# Altium PCB V2.1.PcbDoc
Units mil, origin at the board's own origin, x right, y up, seen from the top; angles counter-clockwise.
Board outline 4375 x 3160 mil, 4 copper layers (Top Layer, gnd, vcc, Bottom Layer), stack 30.634 mil thick; 78 components, 70 nets, 351 pads, 129 vias.
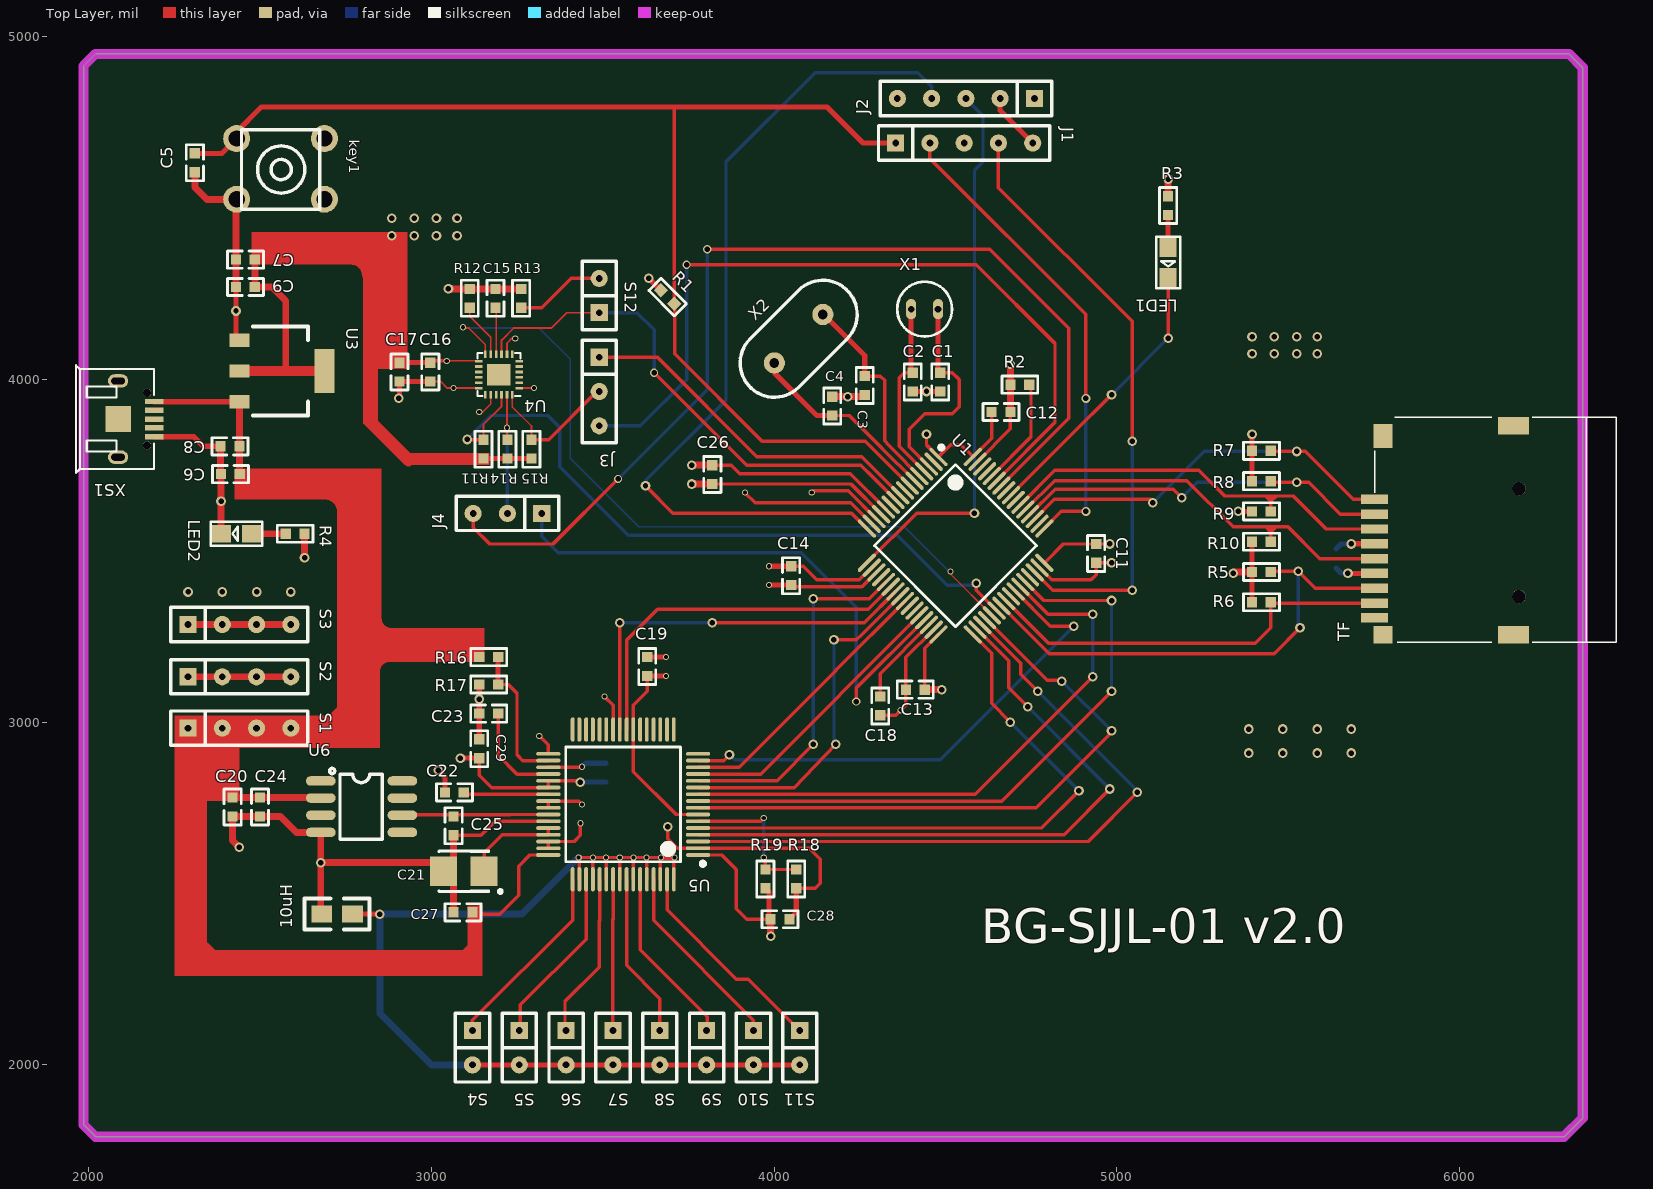
[diagram p0: Top Layer view]
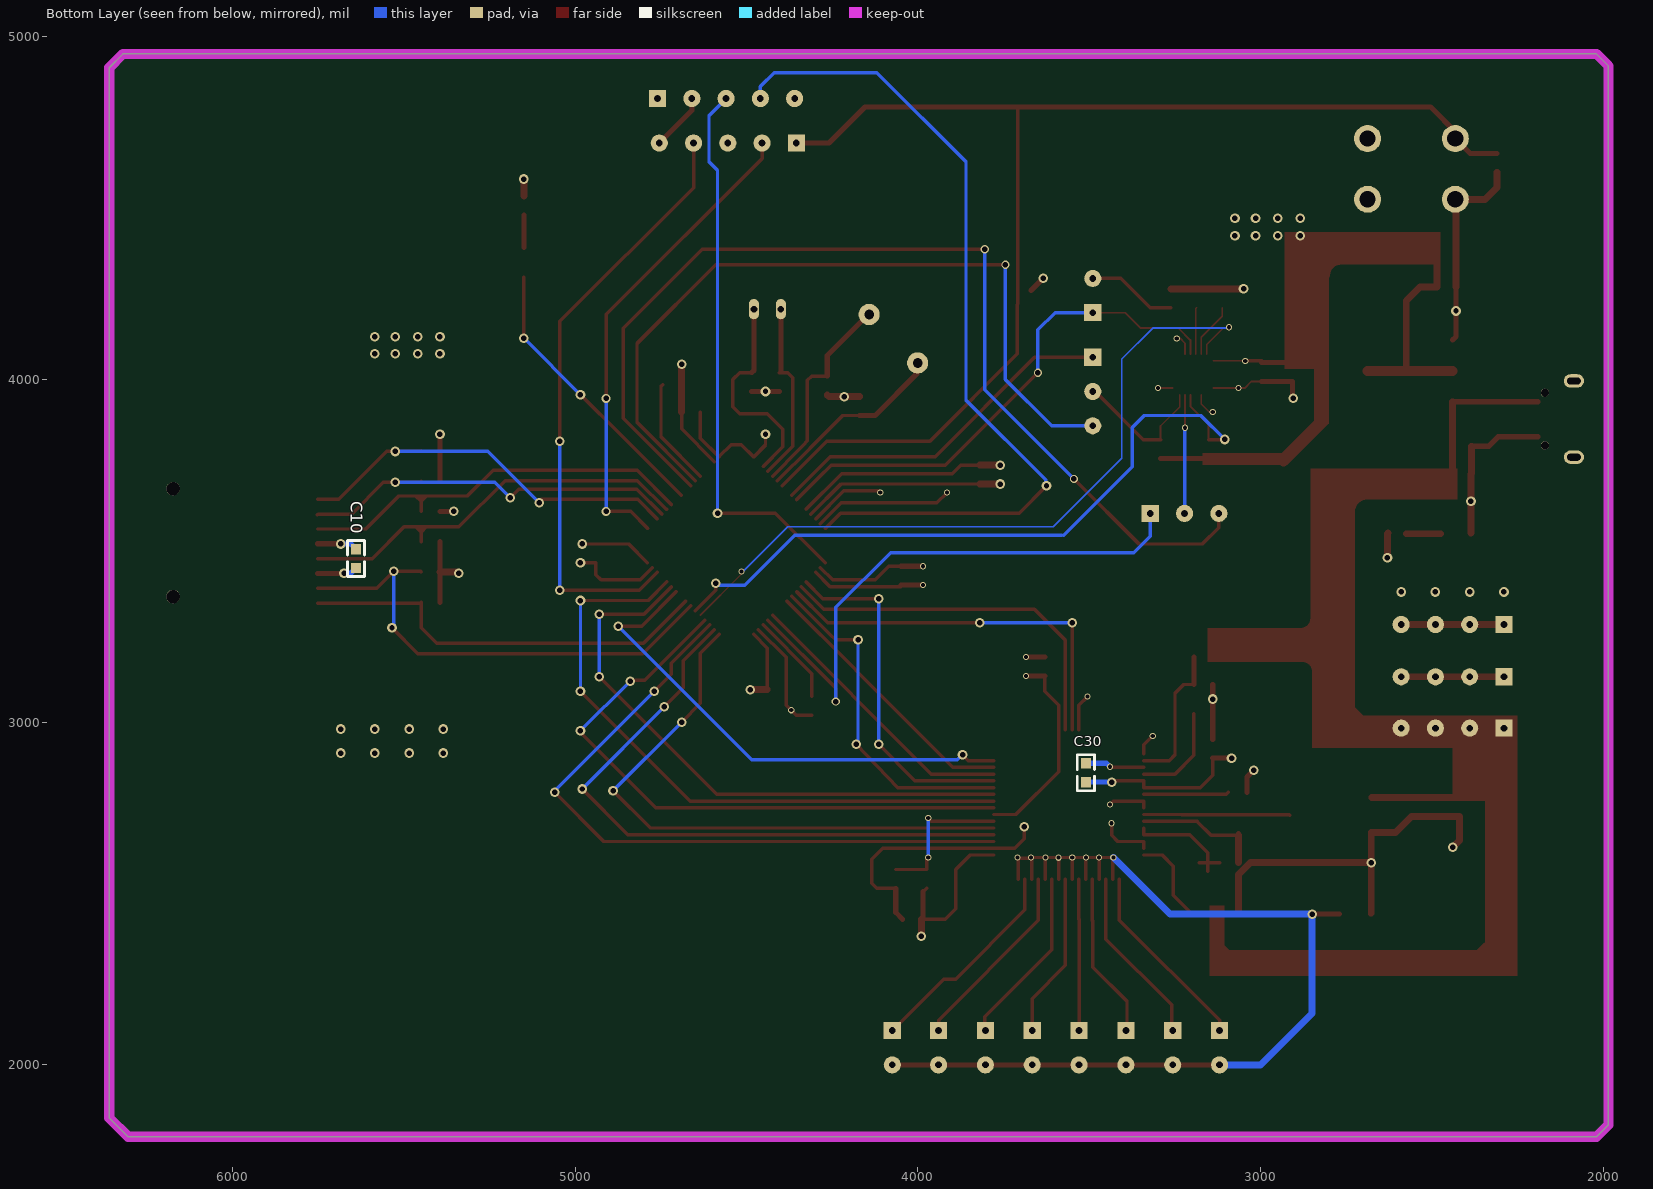
[diagram p1: Bottom Layer view, seen from below]
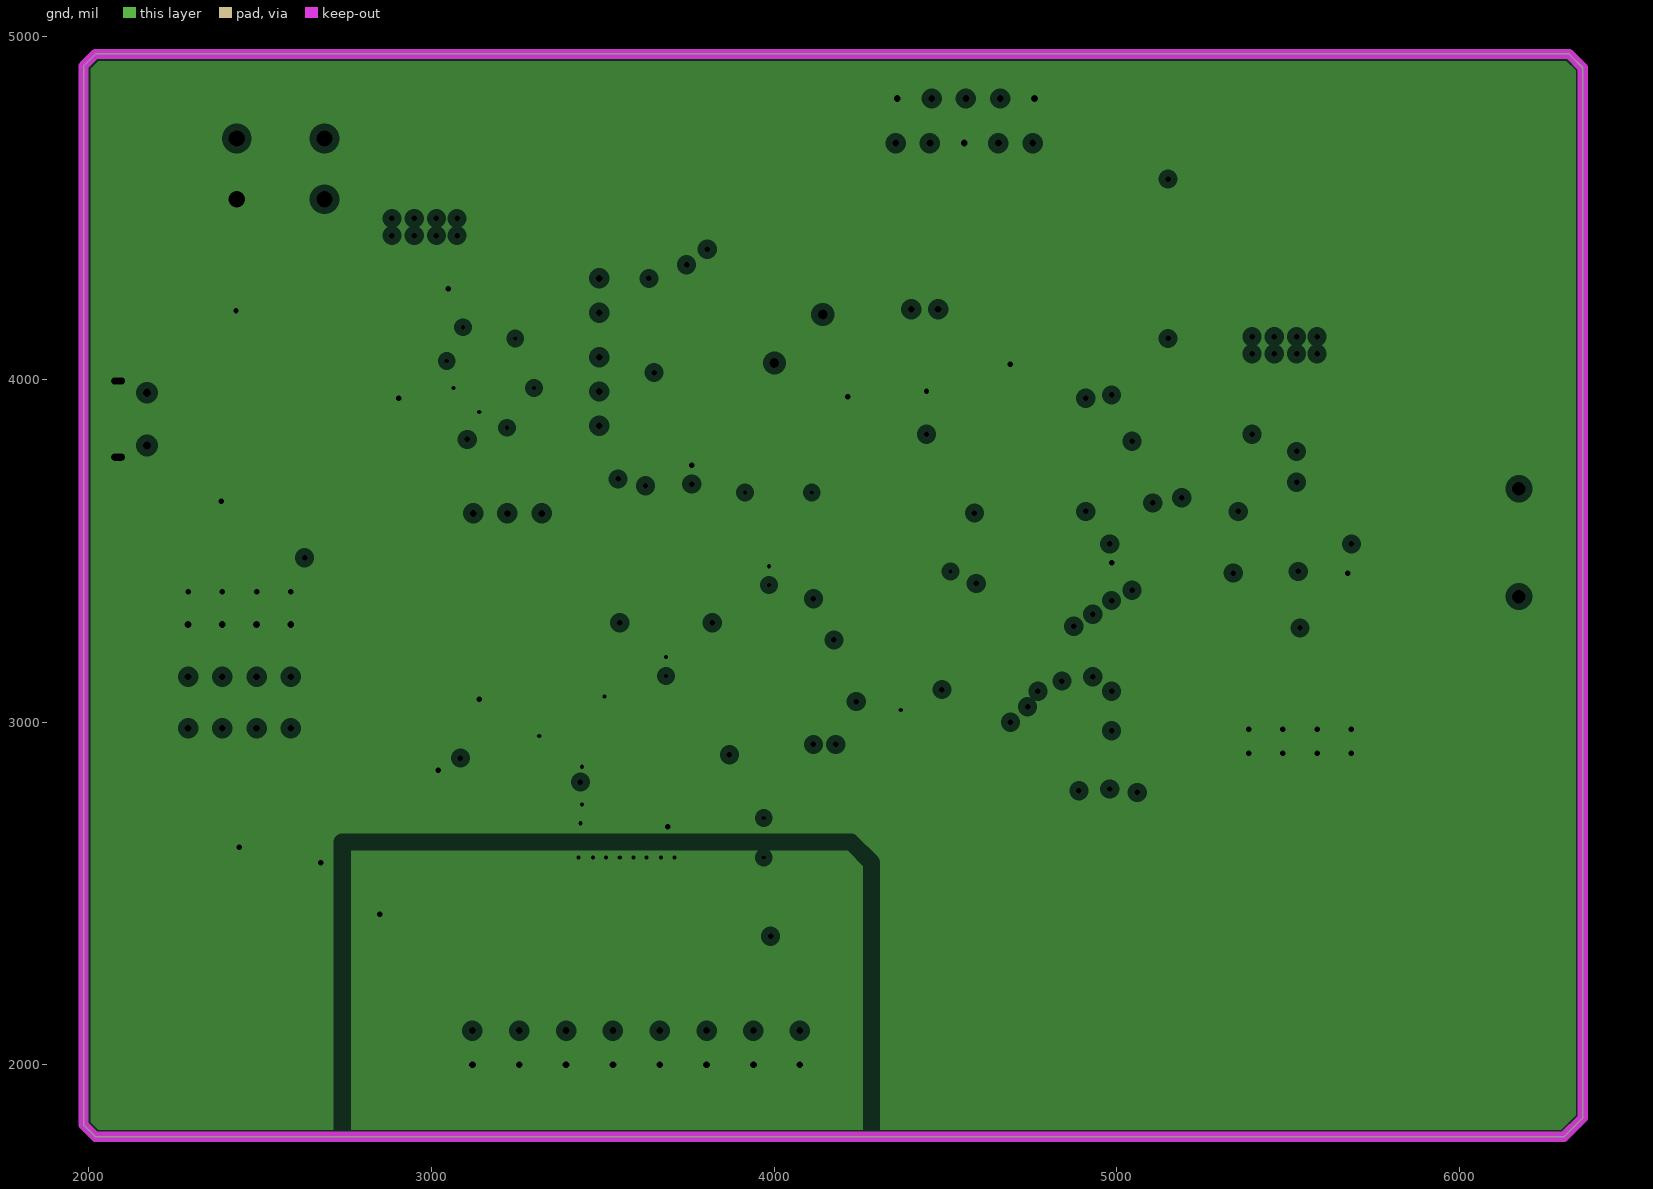
[diagram p2: gnd, clearances drawn from the general rule]
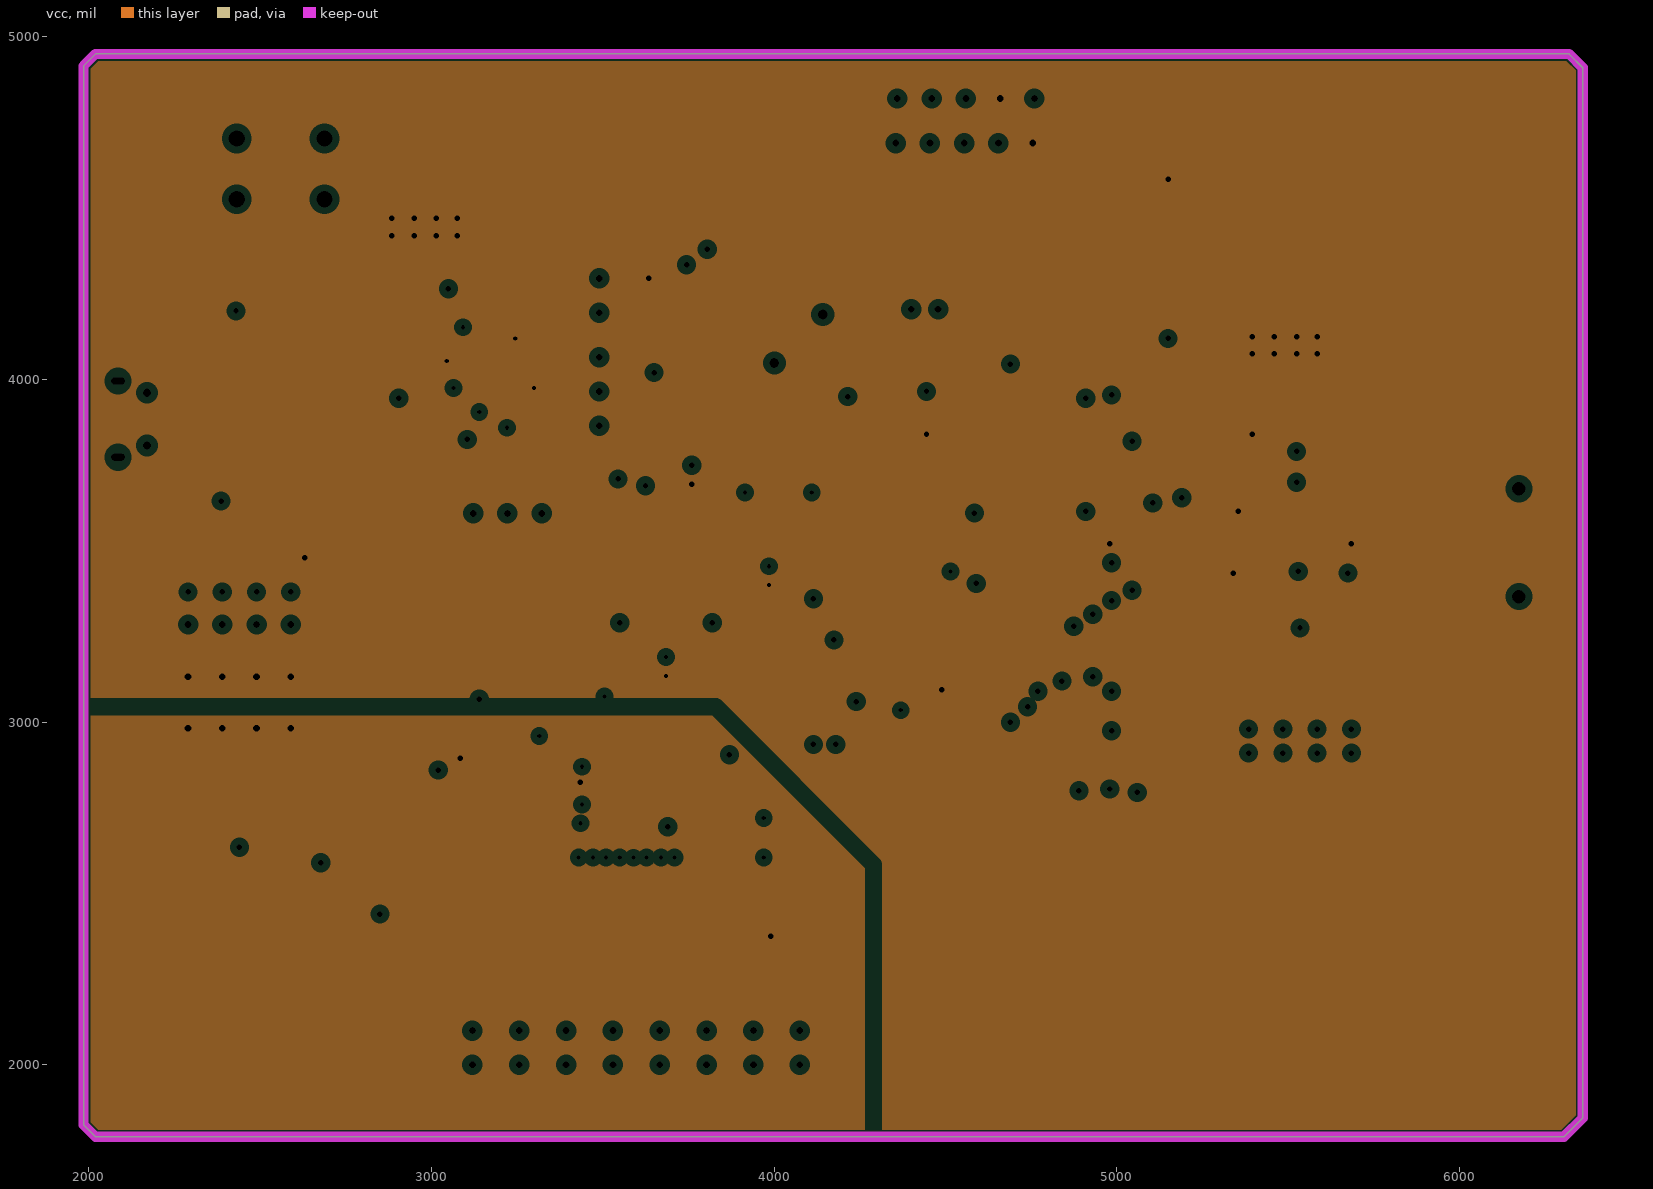
[diagram p3: vcc, clearances drawn from the general rule]

## Layer stack, top to bottom
Top Solder: solder mask 0.4, Solder Resist, Dk 3.5
Top Layer: signal copper 1.4
Dielectric 1: core 10, FR-4, Dk 4.2
gnd: plane copper 1.417, net GND
Dielectric 3: prepreg 5, Dk 4.2
vcc: plane copper 1.417, net 3.3V
Dielectric 2: core 10, Dk 4.2
Bottom Layer: signal copper 1.4
Bottom Solder: solder mask 0.4, Solder Resist, Dk 3.5

## Board outline
1985,1825 1985,4915 2020,4950 6320,4950 6360,4910 6360,1845 6305,1790 2020,1790

## Design rules (kind name [scope] priority, off if disabled: settings)
Clearance [All] p1: gap=10 except(8: Arc-Arc Arc-Track Arc-SMDPad Track-Track Track-SMDPad SMDPad-SMDPad)
ComponentClearance [All] p1: gap=0 collisioncheckmode=3 verticalgap=0 showdistances=FALSE
PlaneClearance [All] p1: clearance=20
PlaneConnect [All] p1: planeconnectstyle=Relief reliefexpansion=20 reliefentries=4 reliefconductorwidth=10 reliefairgap=10
PolygonConnect [All] p1: connectstyle=Relief reliefconductorwidth=10 reliefentries=4 polygonreliefangle="90 Angle" airgapwidth=10
RoutingVias [All] p1: holewidth=28 width=50 viastyle="Through Hole" minholewidth=28 minwidth=50 maxholewidth=28 maxwidth=50
SolderMaskExpansion [All] p1: expansion=4
Width [All] p1: maxlimit=30 minlimit=5 preferedwidth=10
27 further rules are at their usual default settings.

## Classes and differential pairs
net class "New Class": SDIO_CLK SDIO_CMD SDIO_D0 SDIO_D1 SDIO_D2 SDIO_D3

## Components (designator, comment, footprint, x,y, rotation, side; value= is the part's Value field where it differs from the comment)
10uH "L1" 0805 2770,2440 r180 top
C1 "10p" 0603-cap 4485,3965 r90 top
C2 "10p" 0603-cap 4405,3965 r90 top
C3 "22p" 0603-cap 4265,3955 r90 top
C4 "22p" 0603-cap 4170,3950 r270 top
C5 "0.1u" 0603-cap 2310,4660 r270 top
C6 "10u" 0603-cap 2441.35,3724 r180 top
C7 "10u" 0603-cap 2485,4350 r180 top
C8 "0.1u" 0603-cap 2440,3805 r180 top
C9 "0.1u" 0603-cap 2485,4270 r180 top
C10 "0.1u" 0603-cap 5640,3505 r270 bottom
C11 "10u" 0603-cap 4940,3520 r270 top
C12 "0.1u" 0603-cap 4635,3905 r0 top
C13 "0.1u" 0603-cap 4440,3095 r180 top
C14 "0.1u" 0603-cap 4050,3400 r90 top
C15 "0.1u" 0603-cap 3187.12,4264.26 r270 top
C16 "0.01u" 0603-cap 2997.12,3994.26 r90 top
C17 "0.1u" 0603-cap 2907.12,3994.26 r90 top
C18 "4.7u" 0603-cap 4310,3020 r90 top
C19 "0.1uF" 0603-cap 3630,3135 r90 top
C20 "0.1u" 0603-cap 2420,2725 r90 top
C21 "22uF" C1206_Y 3095,2565 r180 top
C22 "0.1u" 0603-cap 3040,2795 r0 top
C23 "0.1u" 0603-cap 3195,3025 r180 top
C24 "10u" 0603-cap 2500,2780 r270 top
C25 "0.1u" 0603-cap 3065,2725 r270 top
C26 "0.1u" 0603-cap 3820,3695 r90 top
C27 "0.1u" 0603-cap 3120,2445 r180 top
C28 "0.1u" 0603-cap 3990,2425 r0 top
C29 "0.1u" 0603-cap 3140,2895 r90 top
C30 "0.1u" 0603-cap 3510,2825 r90 bottom
J1 "CON5" SIP05 4355,4690 r0 top
J2 "CON5" SIP05 4760,4820 r180 top
J3 "CON3" SIP03 3490,4065 r270 top
J4 "CON3" SIP03 3322.12,3609.26 r180 top
key1 "KEY_1" "key - duplicate5" 2545,4590 r180 top
LED1 "LED?" LED 5150,4385 r270 top
LED2 "LED?" LED 2475,3550 r180 top
R1 "10k" 0603-res 3670,4260 r315 top
R2 "10k" 0603-res 4690,3985 r0 top
R3 "1k" 0603-res 5150,4480 r90 top
R4 "1k" 0603-res 2630,3550 r180 top
R5 "4.7k" 0603-res 5395,3438.33 r0 top
R6 "4.7k" 0603-res 5395,3350 r0 top
R7 "4.7k" 0603-res 5395,3791.67 r0 top
R8 "4.7k" 0603-res 5395,3703.33 r0 top
R9 "4.7k" 0603-res 5395,3615 r0 top
R10 "4.7k" 0603-res 5395,3526.67 r0 top
R11 "10k" 0603-res 3152.12,3824.26 r270 top
R12 "10k" 0603-res 3112.12,4264.26 r270 top
R13 "10k" 0603-res 3262.12,4264.26 r270 top
R14 "10k" 0603-res 3222.12,3824.26 r270 top
R15 "10k" 0603-res 3292.12,3824.26 r270 top
R16 "10K" 0603-res 3140,3190 r0 top
R17 "10K" 0603-res 3140,3110 r0 top
R18 "10K" 0603-res 4065,2570 r270 top
R19 "10K" 0603-res 3975,2570 r270 top
S1 "CON4" SIP04 2290,2982.5 r0 top
S2 "CON4" SIP04 2290,3132.5 r0 top
S3 "CON4" SIP04 2290,3285 r0 top
S4 "CON2" SIP02 3120,2100 r270 top
S5 "CON2" SIP02 3256.67,2100 r270 top
S6 "CON2" SIP02 3393.33,2100 r270 top
S7 "CON2" SIP02 3530,2100 r270 top
S8 "CON2" SIP02 3666.67,2100 r270 top
S9 "CON2" SIP02 3803.33,2100 r270 top
S10 "CON2" SIP02 3940,2100 r270 top
S11 "CON2" SIP02 4075,2100 r270 top
S12 "CON2" SIP02 3490,4195 r90 top
TF "U2" TF-01A 5955,3560 r90 top
U1 "STM32F446RET6" LQFP-64_10X10X05P 4530,3515 r315 top
U3 "ASM117-3.3" SOT-223 2440,4115 r270 top
U4 "MPU9250" QFN-24-1EP_3X3MM_PITCH0.4MM 3197.12,4014.26 r180 top
U5 "AD7606BSTZ-4" AD7606 3560,2770 r180 top
U6 "ADR421BR" ADR421 2780,2750 r0 top
X1 "32.768KHz" XTAL-B 4440,4205 r0 top
X2 "8MHz" XTAL2 3980,4225 r135 top
XS1 "USB1" "micro USB" 2143.64,3881.57 r90 top

## Footprints (in the part's own frame and the unit in brackets; to place one, negate y for a bottom-side part, rotate by r counter-clockwise, add the part's x,y. Pads: shape width x height; smd on the part's side, far side on the other; paste and mask are expansions set on the pad)
0603-cap [mil]
  rect 30x30 smd: 1(0,0) 2(55,0)
  silkscreen extent -25,-25 80,25
0603-res [mil]
  rect 30x30 smd: 1(0,0) 2(55,0)
  silkscreen extent -25,-25 80,25
0805 [mil]
  rect 60x50 smd: 1(0,0) 2(90,0)
  silkscreen extent -50,-45 140,45
AD7606 [mm]
  oval 1.8x0.28 smd: 1(-5.55,4.004) 2(-5.55,3.504) 3(-5.55,3.004) 4(-5.55,2.504) 5(-5.55,2.004) 6(-5.55,1.504) 7(-5.55,1.004) 8(-5.55,0.504) 9(-5.55,0.004) 10(-5.55,-0.496) 11(-5.55,-0.996) 12(-5.55,-1.496) 13(-5.55,-1.996) 14(-5.55,-2.496) 15(-5.55,-2.996) 16(-5.55,-3.496) 33(5.55,-3.496) 34(5.55,-2.996) 35(5.55,-2.496) 36(5.55,-1.996) 37(5.55,-1.496) 38(5.55,-0.996) 39(5.55,-0.496) 40(5.55,0.004) 41(5.55,0.504) 42(5.55,1.004) 43(5.55,1.504) 44(5.55,2.004) 45(5.55,2.504) 46(5.55,3.004) 47(5.55,3.504) 48(5.55,4.004)
  oval 0.28x1.8 smd: 17(-3.75,-5.296) 18(-3.25,-5.296) 19(-2.75,-5.296) 20(-2.25,-5.296) 21(-1.75,-5.296) 22(-1.25,-5.296) 23(-0.75,-5.296) 24(-0.25,-5.296) 25(0.25,-5.296) 26(0.75,-5.296) 27(1.25,-5.296) 28(1.75,-5.296) 29(2.25,-5.296) 30(2.75,-5.296) 31(3.25,-5.296) 32(3.75,-5.296) 49(3.75,5.804) 50(3.25,5.804) 51(2.75,5.804) 52(2.25,5.804) 53(1.75,5.804) 54(1.25,5.804) 55(0.75,5.804) 56(0.25,5.804) 57(-0.25,5.804) 58(-0.75,5.804) 59(-1.25,5.804) 60(-1.75,5.804) 61(-2.25,5.804) 62(-2.75,5.804) 63(-3.25,5.804) 64(-3.75,5.804)
  silkscreen extent -6.05,-4 4.25,4.8
ADR421 [mm]
  oval 2.2x0.7 smd: 1(-2.606,1.994) 2(-2.606,0.724) 3(-2.606,-0.546) 4(-2.606,-1.816) 5(3.439,-1.816) 6(3.439,-0.546) 7(3.439,0.724) 8(3.439,1.994)
  silkscreen extent -1.96,-2.32 1.97,2.92
C1206_Y [mm]
  rect 2x2.2 smd: 1(-1.5,0) 2(1.5,0)
  silkscreen extent -2.82,-1.5 1.85,1.62
"key - duplicate5" [mm]
  round 2 hole 1.2: 1(2.869,-2.874) 2(2.869,1.626) 3(-3.631,-2.874) 4(-3.631,1.626)
  silkscreen extent -3.28,-3.52 2.52,2.38
LED [mm]
  rect 1.4x1.27 smd: 1(0,0) 2(2.21,0)
  silkscreen extent -0.8,-0.89 3.01,0.89
LQFP-64_10X10X05P [mm]
  oval 1.8x0.28 smd: 1(-5.55,3.75) 2(-5.55,3.25) 3(-5.55,2.75) 4(-5.55,2.25) 5(-5.55,1.75) 6(-5.55,1.25) 7(-5.55,0.75) 8(-5.55,0.25) 9(-5.55,-0.25) 10(-5.55,-0.75) 11(-5.55,-1.25) 12(-5.55,-1.75) 13(-5.55,-2.25) 14(-5.55,-2.75) 15(-5.55,-3.25) 16(-5.55,-3.75) 33(5.55,-3.75) 34(5.55,-3.25) 35(5.55,-2.75) 36(5.55,-2.25) 37(5.55,-1.75) 38(5.55,-1.25) 39(5.55,-0.75) 40(5.55,-0.25) 41(5.55,0.25) 42(5.55,0.75) 43(5.55,1.25) 44(5.55,1.75) 45(5.55,2.25) 46(5.55,2.75) 47(5.55,3.25) 48(5.55,3.75)
  oval 0.28x1.8 smd: 17(-3.75,-5.55) 18(-3.25,-5.55) 19(-2.75,-5.55) 20(-2.25,-5.55) 21(-1.75,-5.55) 22(-1.25,-5.55) 23(-0.75,-5.55) 24(-0.25,-5.55) 25(0.25,-5.55) 26(0.75,-5.55) 27(1.25,-5.55) 28(1.75,-5.55) 29(2.25,-5.55) 30(2.75,-5.55) 31(3.25,-5.55) 32(3.75,-5.55) 49(3.75,5.55) 50(3.25,5.55) 51(2.75,5.55) 52(2.25,5.55) 53(1.75,5.55) 54(1.25,5.55) 55(0.75,5.55) 56(0.25,5.55) 57(-0.25,5.55) 58(-0.75,5.55) 59(-1.25,5.55) 60(-1.75,5.55) 61(-2.25,5.55) 62(-2.75,5.55) 63(-3.25,5.55) 64(-3.75,5.55)
  silkscreen extent -6.05,-4.25 4.25,4.55
"micro USB" [mm]
  rect 0.4x1.35 smd mask+0.05: 1(1.376,-1.211) 2(0.726,-1.211) 3(0.076,-1.211) 4(-0.574,-1.211) 5(-1.224,-1.211)
  oval 1x1.5 hole 0.5 slot 1 at 90 deg unplated mask+0.05: 6(-2.749,1.465) 7(2.901,1.465)
  round 0.6 hole 0.6 mask+0.05: ""(-1.874,-0.686) ""(2.026,-0.686)
  rect 1.9x1.9 smd mask+0.05: ""(0.076,1.465)
  silkscreen extent -3.92,-1.21 4.08,4.59
QFN-24-1EP_3X3MM_PITCH0.4MM [mm]
  rect 0.55x0.2 smd: 1(-1.5,1) 2(-1.5,0.6) 3(-1.5,0.2) 4(-1.5,-0.2) 5(-1.5,-0.6) 6(-1.5,-1) 13(1.5,-1) 14(1.5,-0.6) 15(1.5,-0.2) 16(1.5,0.2) 17(1.5,0.6) 18(1.5,1)
  rect 0.2x0.55 smd: 7(-1,-1.5) 8(-0.6,-1.5) 9(-0.2,-1.5) 10(0.2,-1.5) 11(0.6,-1.5) 12(1,-1.5) 19(1,1.5) 20(0.6,1.5) 21(0.2,1.5) 22(-0.2,1.5) 23(-0.6,1.5) 24(-1,1.5)
  rect 0.875x0.8 smd: 25(-0.435,0.4) 25(-0.435,-0.4) 25(0.435,0.4) 25(0.435,-0.4)
  silkscreen extent -1.6,-1.6 1.6,1.6
SIP02 [mm]
  rect 1.27x1.27 hole 0.5: 1(0,0)
  round 1.27 hole 0.5: 2(2.54,0)
  silkscreen extent -1.27,-1.27 3.81,1.27
SIP03 [mm]
  rect 1.27x1.27 hole 0.5: 1(0,0)
  round 1.27 hole 0.5: 2(2.54,0) 3(5.08,0)
  silkscreen extent -1.27,-1.27 6.35,1.27
SIP04 [mm]
  rect 1.27x1.27 hole 0.5: 1(0,0)
  round 1.27 hole 0.5: 2(2.54,0) 3(5.08,0) 4(7.62,0)
  silkscreen extent -1.27,-1.27 8.89,1.27
SIP05 [mm]
  rect 1.27x1.27 hole 0.5: 1(0,0)
  round 1.27 hole 0.5: 2(2.54,0) 3(5.08,0) 4(7.62,0) 5(10.16,0)
  silkscreen extent -1.27,-1.27 11.43,1.27
SOT-223 [mil]
  rect 39x59 smd: 1(0,0) 3(180,0)
  rect 129.13x59 smd: 2(90,248.03)
  rect 38.98x59.06 smd: 2(90,0)
  silkscreen extent -40,40 220,200
TF-01A [mm]
  rect 0.7x2 smd: 1(2.291,5.146) 2(1.193,5.143) 3(0.095,5.146) 4(-1.003,5.146) 5(-2.103,5.146) 6(-3.2,5.146) 7(-4.298,5.146) 8(-5.395,5.146) 9(-6.5,5.146)
  rect 1.27x1.397 smd: 10(-7.747,4.507)
  rect 1.27x2.286 smd: 11(-7.747,-5.145) 12(7.747,-5.145)
  rect 1.778x1.397 smd: 13(6.985,4.507)
  round 1 hole 1 unplated: ""(-4.915,-5.557) ""(3.084,-5.554)
  silkscreen extent -8.31,-12.76 8.39,5.14
XTAL2 [mil]
  round 62 hole 28: 1(-140,110) 2(-140,-90)
  silkscreen extent -240,-190 -40,210
XTAL-B [mm]
  oval 0.75x1.5 hole 0.5: 1(-1.011,0.008) 2(0.989,0.008)
  silkscreen extent -2.04,-2.02 2.02,2.04

## Part data
10uH: library part L
C1 C2 C3 C4 C5 C6 C7 C8 C9 C10 C11 C12 C13 C14 C15 C16 C17 C18 C19 C20 C22 C23 C24 C25 C26 C27 C28 C29 C30: library part CAP
C21: library part 电解电容, "Capacitor"
LED1 LED2: library part LED
R1 R2 R3 R4 R5 R6 R7 R8 R9 R10 R11 R12 R13 R14 R15 R16 R17 R18 R19: library part RES
TF: library part TF-01A
U6: library part ADR421
X1 X2: library part XTAL

## Via types
v1: diameter 28, hole 16, Top Layer to Bottom Layer, 92 vias
v2: diameter 18, hole 12, Top Layer to Bottom Layer, 30 vias
v3: diameter 24, hole 16, Top Layer to Bottom Layer, 5 vias
v4: diameter 26, hole 16, Top Layer to Bottom Layer, 2 vias

## Nets (pads, with @x,y where several pads share a name; then routed paths per layer and width w, separated by ;. In a path a pad name is that pad's centre, name@x,y a point inside that pad or via, vN(x,y) a via of type N, cw(c..) or ccw(c..) an arc to the next point about the centre after c; other vN are vias at no path point)
3.3V: C7.1 C9.1 C10.1 C11.1 C12.1 C13.1 C14.1 C16.2 C17.2 C19.1 C26.1 J1.5 J2.2 R1.1 R3.2 R4.1 R5.1 R6.1 R7.1 R8.1 R9.1 R10.1 R11.2 R14.2 R15.2 S2.1 S2.2 S2.3 S2.4 TF.4 U1.1 U1.13 U1.19 U1.32 U1.48 U1.64 U3.2 U4.1 U4.8 U4.13 U5.7 U5.23 | length 6300.1
  Top Layer w5: C16.2 C16.2@2997.12,4054.31 ; v2(3045,4054.31) U4.13@3138.07,4054.31 ; U4.8 3220.75,4105.75 3235,4120 v2(3245,4120) ; U4.1 v2(3299.88,3974.88) v2@3300,3975
  Top Layer w10: 2690,4350 ccw(c2697.5,4397.5) 2703.08,4349.74 ; 2695,4350 cw(c2697.5,4302.5) 2700,4350 cw(c2697.5,4302.5) 2703.08,4349.74 ; 2745,4390 cw(c2697.5,4397.5) 2705,4350 cw(c2697.5,4397.5) 2703.08,4349.74 ; C16.2@2997.12,4054.31 v2(3045,4054.31) ; 3589.53,2940 3589.53,2855.47 3714.53,2730.47 U5.7 ; 3589.53,2940.01 U5.23 3589.53,3049.53 3630,3090 C19.1 ; C26.1 4224.73,3695 U1.13 ; C14.1@4050,3395 4256.88,3395 U1.19 ; C13.1 4440,3216.21 U1.32 ; v1(4445,3840) 4445,3808.79 U1.1 4515.99,3810 4545,3810 4579.52,3775.48 U1.64@4579.52,3774.48 ; U1.64 4635,3828.79 C12.1 ; U1.48@4789.48,3465.48 4844.01,3520 C11.1 v1(4980,3520)
  Top Layer w15: 2725,4350 2740,4365 ; C17.2 C16.2 ; R11.2 R14.2 R15.2 ; C19.1 v2(3685,3135) ; v1(3635,4295) R1.1 ; v2(3985,3400) C14.1 ; J2.2 4660,4785 J1.5 ; v1(5355,3615) R9.1 ; R6.1 R5.1 R10.1 ; R8.1 R7.1 v1(5395,3840) ; v1(5685,3520) 5685.5,3520.5 TF.4
  Top Layer w20: S2.1 S2.2 S2.3 S2.4 ; 2575,4025 2575,4230 2535,4270 C9.1 C7.1 2695,4350 2700,4350 2705,4350 2725,4350 ; R4.1@2628.03,3551.97 R4.1 v1@2630,3490 ; 2760,4350 2810,4350 ; 2825,4040 2825,3885 2940.74,3769.26 R11.2 ; 2850,4050 2906.38,4050 C17.2 2907.12,4252.88 ; v1(2885,4420) 2845,4420 2810,4385 2810,4350 ; 2905,4255 2810,4350 ; v1(3760,3695) C26.1 ; C13.1 v1(4490,3095) ; R3.2 v1(5150,4585) ; v1(5340,3435) 5343.33,3438.33 R5.1
  Top Layer w30: U3.2@2440,4025 2575,4025 U3.2@2688.03,4025 ; 2760,4350 cw(c2765.25,4302.73) 2812.75,4305.23 ; 2815,3880 2933.24,3761.76 2940.74,3769.26
  Bottom Layer w15: C10.1 5655,3520 v1(5685,3520)
  other v1: 2630,3480 5395,4075 5460,4075 5525,4075 5585,4075 5395,4125 5460,4125 5525,4125 5585,4125 2950,4420 3015,4420 3075,4420 2885,4470 2950,4470 3015,4470 3075,4470
5V: C6.1 C8.1 C20.2 C24.1 C27.1 C28.1 C29.1 C30.1 R16.1 R19.2 S1.1 S1.2 S1.3 S1.4 U3.3 U5.1 U5.37 U5.38 U5.48 U6.2 XS1.1 | length 5934.7
  Top Layer w10: 3070,3190 R16.1 ; C27.1 3125,2440 3200,2440 3255,2495 3255,2580 3287.36,2612.36 U5.48 ; C29.1 3140,2845 3175.79,2809.21 U5.38 U5.37 3431.1,2828.9 v1(3435,2825) ; U5.1 3847.64,2612.36 3890,2570 3890,2455 3920,2425 C28.1 C28.1@3985,2430 ; R19.2 R19.2@3985,2505
  Top Layer w15: C6.1@2440,3725.35 C6.1 ; U3.3 2439.25,3935.75 U3.3@2440,3935.75 ; U6.2@2675.9,2780 U6.2 ; v1(3085,2895) C29.1 ; C28.1@3985,2430 R19.2@3985,2505
  Top Layer w16: XS1.1 U3.3@2439.25,3935.75
  Top Layer w20: C6.1@2440,3725.35 C8.1 U3.3 ; C6.1 2656,3724 2735,3645 2735,3040 2677.5,2982.5 S1.4 S1.3 S1.2 ; U6.2@2675.9,2780 C24.1 C20.2 2390,2810 S1.2 ; 2685,3660 cw(c2687.5,3612.5) 2735,3615 ; 2735,3190 R16.1 ; 2840,3145 cw(c2877.5,3147.5) 2875,3185 ; 2845,3310 ccw(c2885,3305) 2880,3265 ; C27.1 3120,2350 3070,2300 2390,2300 2290,2400 S1.1 S1.2 ; v1(3990,2375) C28.1
  Bottom Layer w15: v1(3435,2825) C30.1
AD0/SDO: S12.1 U1.10 U4.9 | length 1523.9
  Top Layer w5: U4.9 3205,4115 3240,4150 3350,4150 3395,4195 S12.1
  Top Layer w10: v3(3650,4020) 3920,3750 4252.8,3750 4273.02,3729.78 ; 4273.24,3730 U1.10
  Bottom Layer w10: S12.1 3600,4195 3650,4145 v3(3650,4020)
ADC1_IN0: U1.14 | length 225
  Top Layer w10: v2(4110,3670) 4115,3675 4216.88,3675 U1.14
ADC1_IN1: U1.15 | length 407.7
  Top Layer w10: v2(3915,3670) 3945,3640 4224.05,3640 U1.15
ADC1_IN8: U1.26
ADC1_IN9: U1.27
BOOT0: R2.2 U1.60 | length 316.2
  Top Layer w10: U1.60 4750,3832.44 4750,3980 R2.2
BUSY: U1.25 U5.14 | length 805.6
  Top Layer w10: U5.14 3898.27,2868.27 4180,3150 4180,3151.08 U1.25
CD: TF.9
CONVST/A: U1.44 U5.9 | length 1878.3
  Top Layer w10: U5.9 4664.84,2769.84 v1(4985,3090) ; U1.44 4787.44,3355 v1(4985,3355)
  Bottom Layer w10: v1(4985,3090) v1(4985,3355)
CONVST/B: U1.43 U5.10 | length 1719.9
  Top Layer w10: U5.10 4474.53,2789.53 ; 4474.53,2789.84 4587.34,2789.84 v1(4930,3132.5) ; U1.43 4799.59,3315 v1(4930,3315)
  Bottom Layer w10: v1(4930,3132.5) v1(4930,3315)
CS: U1.28 U5.13 | length 837.6
  Top Layer w10: U5.13 3961.02,2848.58 U1.28
ESC: U4.7
ESD: U4.21
FRSTDATA: U1.42 U5.15 | length 1482.9
  Top Layer w10: U5.15 3852.95,2887.95 v1(3870,2905) ; U1.42 4806.76,3280 v1(4875,3280)
  Bottom Layer w10: v1(3870,2905) 3885,2890 4485,2890 v1(4875,3280)
FSYNC: R12.2 U4.11 | length 161.4
  Top Layer w5: R12.2 3112.12,4184.26 3173.5,4122.88 U4.11
GND: 10uH.2 C1.1 C2.1 C3.1 C4.1 C5.2 C6.2 C7.2 C8.2 C9.2 C10.2 C11.2 C12.2 C13.2 C14.2 C15.1 C16.1 C17.1 C18.1 C19.2 C20.1 C21.2 C22.1 C23.2 C24.2 C25.2 C26.2 C27.2 C28.2 C29.2 C30.2 J1.3 J2.1 J2.5 key1.2 LED2.2 R2.1 R12.1 R13.1 R17.1 R18.2 S3.1 S3.2 S3.3 S3.4 TF.6 U1.12 U1.18 U1.31 U1.47 U1.63 U3.1 U4.18 U4.20 U5.2 U5.26 U5.33 U5.35 U5.40 U5.41 U5.43 U5.46 U5.47 U6.4 XS1.5 XS1.6 XS1.7 | length 7258
  Top Layer w5: C16.1 3027.12,3994.26 3046.5,3974.88 U4.18 ; v2(3140,3905) 3150,3905 3173.5,3928.5 U4.20
  Top Layer w10: C25.2 3145,2670 3185,2710 ; 3185,2710.79 U5.43 ; v2(3315,2960) 3341.5,2933.5 U5.33 ; U5.47 U5.46 3416.73,2651.73 3435,2670 v2(3435,2705) ; U5.41 U5.40 3430.16,2769.84 v2(3440,2760) ; U5.35 3438.27,2868.27 v2(3440,2870) ; v2(3505,3075) 3530.47,3049.53 U5.26 ; v1(3690,2695) 3690,2660 3717.95,2632.05 U5.2 4102.95,2632.05 4135,2600 4135,2530 4120,2515 R18.2 ; C26.2 3875,3750 3900,3725 4222.56,3725 U1.12 ; C14.2 4085,3455 4125,3415 4249.05,3415 U1.18 ; C18.1 4355,3020 4385,3050 C13.2 4385,3189.05 U1.31 ; U1.63 4690,3855.95 C12.2 ; U1.47 4810.95,3415 4925,3415 4940,3430 C11.2 v1(4985,3465)
  Top Layer w15: C6.2@2385,3725.35 C6.2 ; LED2.2@2386.35,3551.64 LED2.2 ; C9.2 v1(2430,4200) 2430,4125 U3.1 ; 10uH.2@2677.4,2442.6 10uH.2 ; v1(2677.4,2590) 2677.4,2585 v1@2682.4,2590 ; v1(2905,3945) 2907.12,3947.12 C17.1 C16.1 ; v1(3020,2860) 3040,2840 C22.1 ; C25.2 C25.2@3065,2675 ; C29.2 C23.2 v1(3140,3067.5) R17.1 ; C19.2 v2(3685,3190) ; v2(3985,3455) C14.2 ; C28.2 4065,2445 R18.2 ; C2.1 C1.1 ; v1(5675,3435) 5676,3434 TF.6
  Top Layer w16: XS1.5 2306.61,3833.39 2335,3805 C8.2
  Top Layer w20: S3.1 S3.2 S3.3 S3.4 ; C5.2 2310,4560 2345,4525 2428.94,4525 key1.2@2430,4523.94 ; C6.2@2385,3725.35 C8.2 ; LED2.2@2386.35,3551.64 C6.2 ; C9.2 C7.2 key1.2@2430,4523.94 ; key1.2 key1.2@2430,4523.94 ; v1@2435,2640 2420,2655 C20.1 C24.2 2560,2725 2606.5,2678.5 U6.4 v1(2677.4,2590) ; 10uH.2@2677.4,2442.6 v1@2677.4,2585 ; v1@2682.4,2590 3030,2590 3065,2555 C27.2 ; v1@3060,4265 3060.74,4264.26 R12.1 ; C21.2@3065,2590 C25.2 ; R12.1 C15.1 ; C15.1 R13.1 ; v1(3760,3750) C26.2 ; C4.1 4260,3950 C3.1 ; C12.2 R2.1 v1(4690,4045)
  Bottom Layer w15: v2(3440,2870) 3450,2880 C30.2 ; C10.2 5655,3435 v1(5675,3435)
  other v1: 2440,2635 5385,2910 5485,2910 5585,2910 5685,2910 5385,2980 5485,2980 5585,2980 5685,2980 2290,3380 2390,3380 2490,3380 2590,3380 2386.35,3645 4215,3950 4445,3965 3050,4265
  other v2: 4370,3035 3065,3974.88
I2C1_SCL: J4.3 U1.58 | length 3021.1
  Top Layer w10: J4.3 3122.12,3567.88 3170,3520 3355,3520 v3(3545,3710) ; v3(3805,4380) 4630,4380 4860,4150 4860,3886.76 U1.58
  Bottom Layer w10: v3@3552.5,3717.5 3805,3970 v3(3805,4380)
I2C1_SDA: J3.3 U1.59 | length 2287.3
  Top Layer w10: v3(3745,4335) 4590,4335 4820,4105 4820,3875.05 4734.77,3789.82 ; U1.59 4735,3789.59
  Bottom Layer w10: J3.3 3610,3865 3745,4000 v3(3745,4335)
INT: U1.37 U4.12 | length 2180.8
  Top Layer w5: v2(3092.5,4152.5) 3095,4150 3110,4150 3157.75,4102.25 U4.12 ; v2(4515,3440) 4515,3432.56 U1.37
  Bottom Layer w5: v2(3092.5,4152.5) 3095,4150 3315,4150 3405,4060 3405,3770 3605,3570 3645,3570 4380,3570 4510,3440 v2(4515,3440)
LED: LED1.2 U1.56 | length 904.4
  Top Layer w10: U1.56 4983.92,3955 v1(4985,3955) 4930,3900 ; v1(5150,4120) LED1.2
  Bottom Layer w10: v1(4985,3955) 4985,3956.08 5148.92,4120 v1(5150,4120)
NCS: R11.1 U1.38 U4.22 | length 2087.8
  Top Layer w5: R11.1 3152.12,3869.26 3205,3922.13 U4.22
  Top Layer w10: v1(3105,3825) 3105.74,3824.26 R11.1 ; v1(4590,3405) 4590,3385.41 U1.38
  Bottom Layer w10: v1(3105,3825) 3175,3895 3340,3895 3375,3860 3375,3745 3575,3545 ; 3580,3545 4360,3545 4505,3400 4585,3400 v1(4590,3405)
NetC1_2: C1.2 U1.3 X1.2 | length 635.6
  Top Layer w10: U1.3 4395,3803.12 4395,3855 4440,3900 4520,3900 4540,3920 4540,4000 4520,4020 C1.2
  Top Layer w15: X1.2 4478.93,4026.07 C1.2
NetC2_2: C2.2 U1.4 X1.1 | length 536.7
  Top Layer w10: C2.2@4400.19,4024.81 C2.2 4380,4020 4365,4005 4365,3805.27 U1.4
  Top Layer w15: C2.2@4400.19,4024.81 X1.1
NetC3_2: C3.2 U1.5 X2.2 | length 616.3
  Top Layer w10: C3.2 4310,4010 4322.61,3997.39 4322.61,3820.72 4335.23,3808.1 4335.23,3807.65 4345,3797.88 ; 4345.22,3797.66 4345,3797.88 ; U1.5 4345,3797.44 4345,3797.88
  Top Layer w15: X2.2 4145.36,4189.64 4265,4070 C3.2
NetC4_2: C4.2 U1.6 X2.1 | length 569.4
  Top Layer w10: C4.2 4220.05,3895 4315,3800.05 ; 4315.23,3799.82 4315,3800.05 ; U1.6 4315,3799.59 4315,3800.05
  Top Layer w15: X2.1 4001.21,4018.79 4125,3895 C4.2
NetC15_2: C15.2 U4.10 | length 136.8
  Top Layer w5: C15.2 3189.25,4207.13 U4.10
NetC18_2: C18.2 U1.30 | length 267.8
  Top Layer w10: C18.2 4310,3141.88 U1.30
NetC21_1: C21.1 U5.44 U5.45 | length 342.9
  Top Layer w10: C21.1@3120,2590 C21.1@3154.05,2590 ; C21.1 C21.1@3154.05,2590 ; C21.1@3180,2590 C21.1@3154.05,2590 ; U5.44 U5.45 3206.42,2671.42 3154.05,2619.05 C21.1@3154.05,2590
NetC22_2: C22.2 U5.39 | length 248.8
  Top Layer w10: C22.2 3100.47,2789.53 U5.39
NetC23_1: C23.1 U5.36 | length 290.7
  Top Layer w10: C23.1 3195,2903.58 3250,2848.58 U5.36
NetLED1_1: LED1.1 R3.1 | length 95
  Top Layer w15: LED1.1 R3.1
NetLED2_1: LED2.1 R4.2 | length 100
  Top Layer w20: LED2.1 R4.2
NetR13_2: R13.2 S12.2 | length 263.4
  Top Layer w10: R13.2 3322.13,4209.26 3407.87,4295 S12.2
NetR16_2: R16.2 R17.2 U5.34 | length 423.9
  Top Layer w10: R17.2 3225,3110 3250,3085 3250,2905 3267.05,2887.95 U5.34
  Top Layer w15: R17.2 R16.2
NetR18_1: R18.1 R19.1 U5.6 | length 437.4
  Top Layer w10: U5.6 3960.79,2710.79 v2(3970,2720) ; v2(3970,2605) 3975,2600 R19.1 R18.1
  Bottom Layer w10: v2(3970,2605) v2(3970,2720)
NetS4_1: S4.1 U5.49 | length 562.6
  Top Layer w10: S4.1 3120,2130 3412.36,2422.36 U5.49
NetS5_1: S5.1 U5.51 | length 522.3
  Top Layer w10: S5.1 3260,2103.33 3260,2175 3451.73,2366.73 U5.51
NetS6_1: S6.1 U5.53 | length 484.8
  Top Layer w10: S6.1 3390,2103.33 3390,2185 3490,2285 3490,2420 3491.1,2421.1 U5.53
NetS7_1: S7.1 U5.55 | length 441.7
  Top Layer w10: S7.1 3530,2425 3530.47,2425.47 U5.55
NetS8_1: S8.1 U5.57 | length 481.8
  Top Layer w10: U5.57 3569.84,2425.16 ; 3570,2425 3569.84,2425.16 ; S8.1 3666.67,2193.33 3569.84,2290.16 3569.84,2425.16
NetS9_1: S9.1 U5.59 | length 524.4
  Top Layer w10: U5.59 3609.21,2425.79 ; 3610,2425 3609.21,2425.79 ; S9.1 3805,2101.67 3805,2140 3609.21,2335.79 3609.21,2425.79
NetS10_1: S10.1 U5.61 | length 562.2
  Top Layer w10: U5.61 3648.58,2421.42 3940,2130 S10.1
NetS11_1: S11.1 U5.63 | length 622.3
  Top Layer w10: U5.63 3687.95,2452.05 3890,2250 3925,2250 S11.1
NRST: C5.1 J1.1 key1.1 R1.2 U1.7 | length 3708
  Top Layer w10: 3705,4795 3708.89,4791.11 R1.2 ; R1.2@3710,4218.61 3710,4075 3965,3820 4266.76,3820 U1.7
  Top Layer w15: C5.1 2388.9,4660 key1.1 ; key1.1@2427.05,4718.15 2503.9,4795 3705,4795 4155,4795 4260,4690 J1.1
OS0: U1.35 U5.3 | length 2017
  Top Layer w10: U5.3 4916.73,2651.73 v1(5060,2795) ; U1.35 4720,3171.88 4720,3140 v1(4770,3090)
  Bottom Layer w10: v1(4770,3090) 5060,2800 v1(5060,2795)
OS1: U1.34 U5.4 | length 1881.6
  Top Layer w10: U5.4 4841.42,2671.42 ; U1.34 4685,3179.05 4685,3100 v1(4740,3045) ; 4841.42,2671.73 4846.73,2671.73 v1(4980,2805)
  Bottom Layer w10: v1(4740,3045) v1(4980,2805)
OS2: U1.33 U5.5 | length 1740.9
  Top Layer w10: U5.5 4781.1,2691.1 ; U1.33 4635,3201.21 4635,3055 v1(4690,3000) ; 4781.1,2691.42 4781.42,2691.42 v1(4890,2800)
  Bottom Layer w10: v1(4690,3000) v1(4890,2800)
RANGE: U1.36 U5.8 | length 1798.2
  Top Layer w10: U5.8 4765.16,2750.16 v1@4987.5,2972.5 ; U1.36 4744.73,3175 ; 4745,3175 4744.73,3175 ; v1(4840,3120) 4837.64,3122.36 4797.36,3122.36 4744.73,3175
  Bottom Layer w10: v1(4840,3120) v1(4985,2975)
RESET: U1.24 U5.11 | length 1008.8
  Top Layer w10: U5.11 4059.21,2809.21 v1(4180,2935) ; v1(4175,3240) 4240.63,3240 4255.63,3255 ; 4255.86,3255.23 4255.63,3255 ; U1.24 4256.08,3255 4255.63,3255
  Bottom Layer w10: v1(4175,3240) 4175,2940 v1(4180,2935)
SCL: J4.2 R14.1 U4.23 | length 382.1
  Top Layer w5: U4.23 v2(3220.75,3859.26) 3220.75,3825.63 R14.1
  Bottom Layer w5: v2(3220.75,3859.26) v2@3222.12,3857.88
  Bottom Layer w10: J4.2 v2@3222.12,3857.88
SDA/SDI: J3.2 R15.1 U4.24 | length 410.2
  Top Layer w5: U4.24 3236.49,3919.89 3292.12,3864.26 R15.1 ; J3.2@3482.87,3965 J3.2
  Top Layer w10: R15.1 3342.13,3824.26 J3.2@3482.87,3965
SDIO_CLK: R10.2 TF.5 U1.53 | length 1249.2
  Top Layer w10: U1.53 4734.87,3620.78 4819.09,3705 5205,3705 5340,3570 5435,3570 ; R10.2 5450,3555 ; TF.5 5592.8,3477.2 5500,3570 5465,3570 ; 5435,3570 5450,3570 ; 5435,3570 5450,3555 ; 5450,3555 5450,3570 ; 5450,3555 5465,3570 ; 5450,3555 5450,3570 ; 5450,3570 5465,3570
SDIO_CMD: R9.2 TF.3 U1.54 | length 1248
  Top Layer w10: U1.54 4819.59,3735 5240,3735 5315,3660 5435,3660 ; R9.2 5450,3645 ; TF.3 5611.25,3563.75 5515,3660 5465,3660 ; 5435,3660 5450,3660 ; 5435,3660 5450,3645 ; 5450,3645 5465,3660 ; 5450,3645 5450,3660 ; 5450,3645 5450,3660 ; 5450,3660 5465,3660
SDIO_D0: R5.2 TF.7 U1.39 | length 1457.9
  Top Layer w10: U1.39 4803.24,3200 5460,3200 v1(5535,3275) ; R5.2 5451.67,3440 v1(5530,3440) 5579.2,3390.8 TF.7
  Bottom Layer w10: v1@5525,3435 v1(5530,3440) 5530,3280 v1(5535,3275)
SDIO_D1: R6.2 TF.8 U1.40 | length 1220.7
  Top Layer w10: U1.40 4801.08,3230 5405,3230 5450,3275 R6.2 5452.4,3347.6 TF.8
SDIO_D2: R7.2 TF.1 U1.51 | length 1205.7
  Top Layer w10: U1.51 4818.12,3650 v1@5100,3650 ; R7.2 5451.67,3790 v1(5525,3790) 5550,3790 5689.8,3650.2 TF.1
  Bottom Layer w10: v1(5105,3640) 5255,3790 v1(5525,3790)
SDIO_D3: R8.2 TF.2 U1.52 | length 1180.4
  Top Layer w10: U1.52 4820.27,3680 5165,3680 v1(5190,3655) ; R8.2 5453.33,3700 5560,3700 5653.05,3606.95 5750.56,3606.95 TF.2@5752.52,3605
  Bottom Layer w10: v1(5190,3655) 5235,3700 v1(5525,3700)
SGND: 10uH.1 S4.2 S5.2 S6.2 S7.2 S8.2 S9.2 S10.2 S11.2 U5.50 U5.52 U5.54 U5.56 U5.58 U5.60 U5.62 U5.64 | length 3091.1
  Top Layer w10: U5.50 3432.05,2602.95 v2(3430,2605) v2(3471.42,2605) ; U5.52 v2(3471.42,2605) ; U5.54 3510.79,2604.21 v2(3510,2605) ; U5.56 3550.16,2604.84 v2(3550,2605) ; U5.58 v2(3589.53,2604.53) v2@3590,2605 ; U5.60 3628.9,2598.9 v2@3630,2600 ; U5.62 v2@3668.27,2603.27 ; v2(3670,2605) v2@3668.27,2603.27 ; U5.64 3707.64,2602.64 v2@3708.27,2603.27 ; v2(3710,2605) v2@3708.27,2603.27 ; v2(3471.42,2605) v2(3510,2605) ; v2(3510,2605) v2(3550,2605) ; v2(3550,2605) v2@3590,2605 ; v2@3590,2605 v2(3628.27,2605) 3666.54,2605 v2@3668.27,2603.27 ; v2@3668.27,2603.27 v2@3708.27,2603.27
  Top Layer w15: 10uH.1 v1(2850,2440) ; S4.2 S5.2 S6.2 S7.2 S8.2 S9.2 S10.2 S11.2
  Bottom Layer w20: S4.2 3000,2000 2850,2150 v1(2850,2440) 3265,2440 v2(3430,2605)
SPI1_MISO: U1.22 U5.24 | length 1096.6
  Top Layer w10: U5.24 3569.84,3239.84 3660,3330 4275.41,3330 U1.22
SPI1_MOSI: U1.23 U5.25 | length 1154.2
  Top Layer w10: 3550,3120 3550.16,3119.84 ; U5.25 3550.16,3119.84 ; v1@3550.16,3290 3550.16,3119.84 ; v1(3820,3290) 4263.24,3290 U1.23
  Bottom Layer w10: v1(3550,3290) v1(3820,3290)
SPI1_SCK: U1.21 U5.12 | length 1037.6
  Top Layer w10: U5.12 4008.9,2828.9 v1(4115,2935) ; v1(4115,3360) 4277.56,3360 U1.21
  Bottom Layer w10: v1(4115,2935) v1(4115,3360)
SPI2_MOSI: J3.1 U1.9 | length 1045.2
  Top Layer w10: J3.1 3660,4065 3950,3775 4256.08,3775 U1.9
SPI2_SCK: J4.1 U1.29 | length 1668.8
  Top Layer w10: v3(4240,3060) 4240,3099.73 U1.29
  Bottom Layer w10: J4.1 3322.12,3542.88 3370,3495 4080,3495 4240,3335 v3(4240,3060) v3@4242.5,3057.5
TCK_SWCLK: J1.2 U1.49 | length 1405.2
  Top Layer w10: J1.2 4455,4645 4910,4190 v4(4910,3945) ; U1.49 4838.79,3615 v4(4910,3615)
  Bottom Layer w10: v4(4910,3615) v4(4910,3945)
TMS_SWDIO: J1.4 U1.46 | length 1772
  Top Layer w10: J1.4 4655,4560 5045,4170 v1(5045,3820) ; U1.46 4813.12,3385 v1(5045,3385)
  Bottom Layer w10: v1(5045,3385) v1(5045,3820)
U2_RX: J2.3 U1.17 | length 1615.1
  Top Layer w10: U1.17 4416.21,3610 v1(4585,3610)
  Bottom Layer w10: J2.3 4610,4770 4610,4635 4585,4610 v1(4585,3610)
U2_TX: J2.4 U1.16 | length 2499.4
  Top Layer w10: v1(3625,3690) 3705,3610 4226.21,3610 U1.16
  Bottom Layer w10: v1(3625,3690) 3627.5,3692.5 3627.5,3707.5 3860,3940 3860,4635 4120,4895 4420,4895 4460,4855 J2.4
VREF: C25.1 U5.42 U6.6 | length 426.9
  Top Layer w10: U6.6 2916.9,2730 3230,2730 3230.47,2730.47 U5.42
pads on no net: key1.3 key1.4 TF. TF.10 TF.11 TF.12 TF.13 U1.2 U1.8 U1.11 U1.20 U1.41 U1.45 U1.50 U1.55 U1.57 U1.61 U1.62 U4.2 U4.3 U4.4 U4.5 U4.6 U4.14 U4.15 U4.16 U4.17 U4.19 U4.25 U5.16 U5.17 U5.18 U5.19 U5.20 U5.21 U5.22 U5.27 U5.28 U5.29 U5.30 U5.31 U5.32 U6.1 U6.3 U6.5 U6.7 U6.8 XS1. XS1.2 XS1.3 XS1.4

## Polygon pours and split planes (outlines as drawn)
SGND on gnd (split plane): 4259.92,2579.61 4259.92,1810.1 2765.08,1810.1 2765.08,2624.92 4214.61,2624.92
GND on gnd (split plane): 6339.9,4901.68 6339.9,1853.32 6296.68,1810.1 4310.08,1810.1 4310.08,2590 4309.77,2593.92 4308.85,2597.75 4307.34,2601.38 4305.29,2604.74 4302.73,2607.73 4242.73,2667.73 4239.74,2670.29 4236.38,2672.34 4232.75,2673.85 4228.92,2674.77 4225,2675.08 2740,2675.08 2736.08,2674.77 2732.25,2673.85 2728.62,2672.34 2725.26,2670.29 2722.27,2667.73 2719.71,2664.74 2717.66,2661.38 2716.15,2657.75 2715.23,2653.92 2714.92,2650 2714.92,2635 2714.92,1810.1 2028.32,1810.1 2005.1,1833.32 2005.1,4906.68 2028.32,4929.9 6311.68,4929.9
5V on vcc (split plane): 4264.92,2574.61 4264.92,1810.1 2028.32,1810.1 2005.1,1833.32 2005.1,3019.92 3819.61,3019.92
3.3V on vcc (split plane): 6339.9,4901.68 6339.9,1853.32 6296.68,1810.1 4315.08,1810.1 4315.08,2585 4314.77,2588.92 4313.85,2592.75 4312.34,2596.38 4310.29,2599.74 4307.73,2602.73 3847.73,3062.73 3844.74,3065.29 3841.38,3067.34 3837.75,3068.85 3833.92,3069.77 3830,3070.08 2005.1,3070.08 2005.1,4906.68 2028.32,4929.9 6311.68,4929.9

## Keep-outs
Keep-Out Layer:
  lines w30: 1985,1825 1985,1890 1985,4915 2020,4950 6320,4950 6360,4910 6360,4635 6360,1845 6305,1790 2705,1790 2020,1790 1985,1825

## Other copper
Top Layer:
  rectangle net 5V: 2425,3650 2750,3740
  rectangle net 5V: 2725,3185 2855,3740
  rectangle net 3.3V: 2935,3750 3170,3785
  rectangle net 3.3V: 2800,3870 2845,4030
  rectangle net 5V: 2345,2770 2440,2925
  rectangle net 5V: 3105,2260 3150,2465
  rectangle net 5V: 2250,2260 3105,2335
  rectangle net 5V: 2250,2260 2345,2925
  rectangle net 5V: 2850,3175 3155,3275
  rectangle net 5V: 2725,2925 2850,3185
  rectangle net 5V: 2250,2925 2850,3020
  rectangle net 3.3V: 2800,4030 2930,4270
  rectangle net 3.3V: 2475,4335 2800,4430
  rectangle net 3.3V: 2800,4240 2930,4430
gnd (plane layer: these items are gaps in the copper):
  lines w50: 2740,2635 2740,1795 2740,2650 4225,2650 4285,2590 4285,1790
vcc (plane layer: these items are gaps in the copper):
  lines w50: 1990,3045 2775,3045 3830,3045 4290,2585 4290,1790

## Silkscreen, mask and mechanical layers (free items; w line width, h text height)
Top Overlay:
  text "BG-SJJL-01 v2.0" at 4605,2355 h100